# Altium PCB powermodel.PcbDoc
Units mm, origin at the board's own origin, x right, y up, seen from the top; angles counter-clockwise.
Board outline 100 x 57 mm, 2 copper layers (Top Layer, Bottom Layer); 19 components, 11 nets, 77 pads, 3 vias.
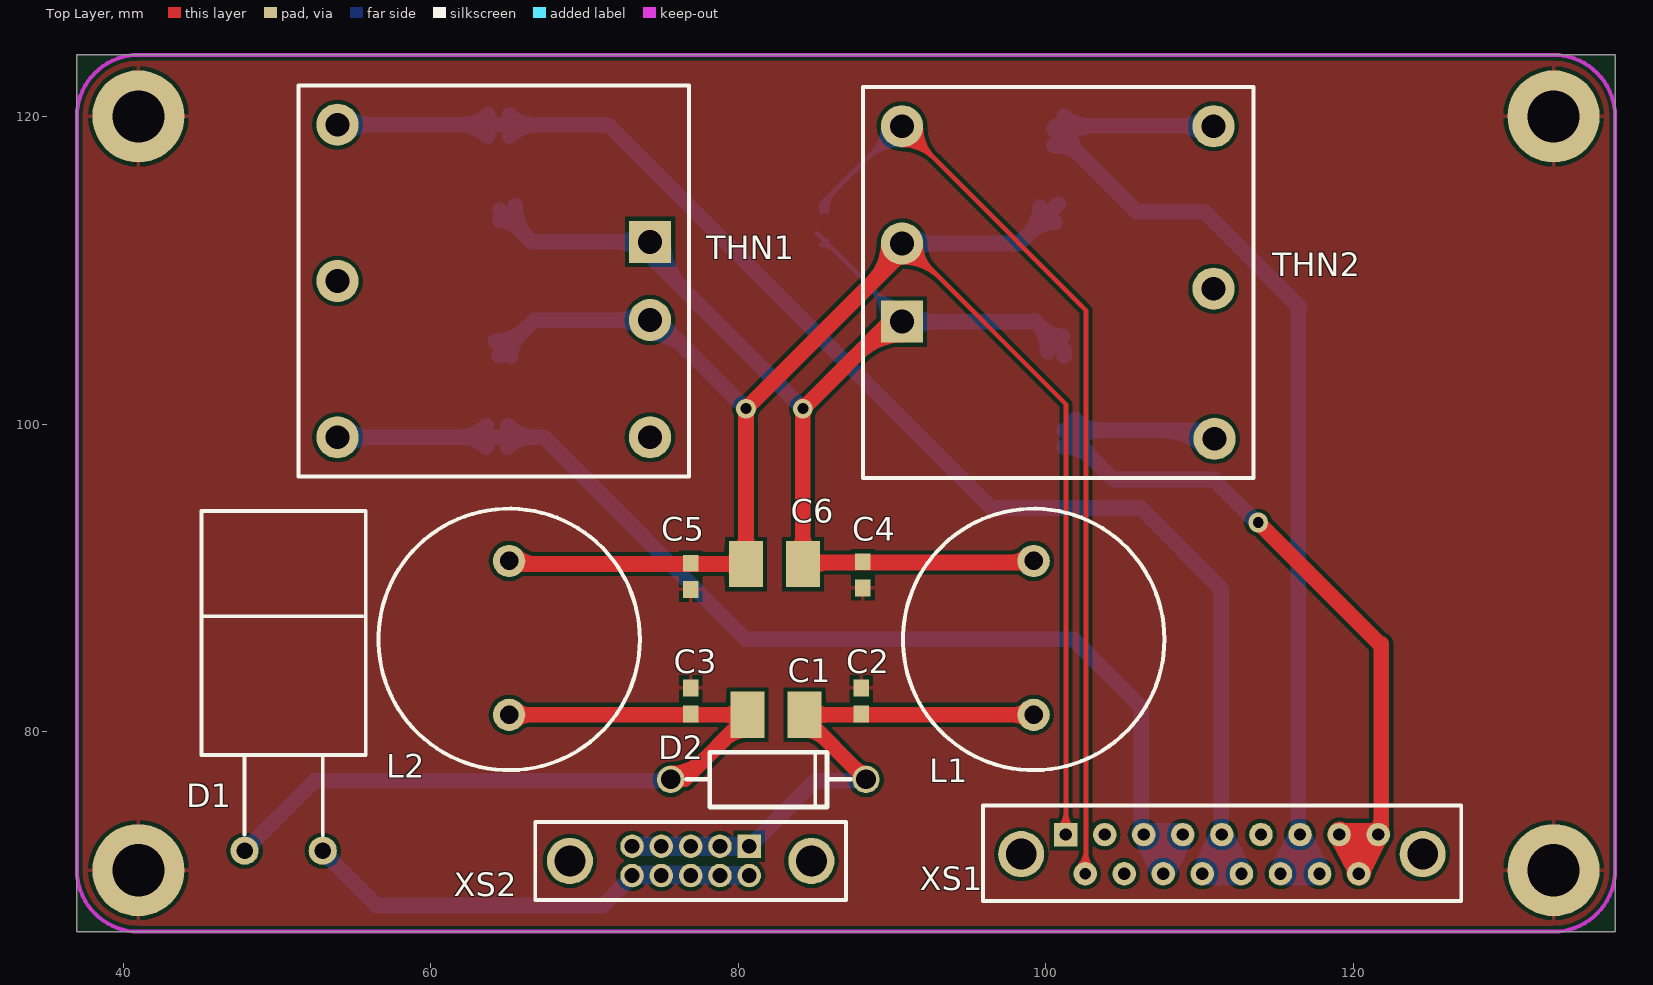
[diagram p0: Top Layer view]
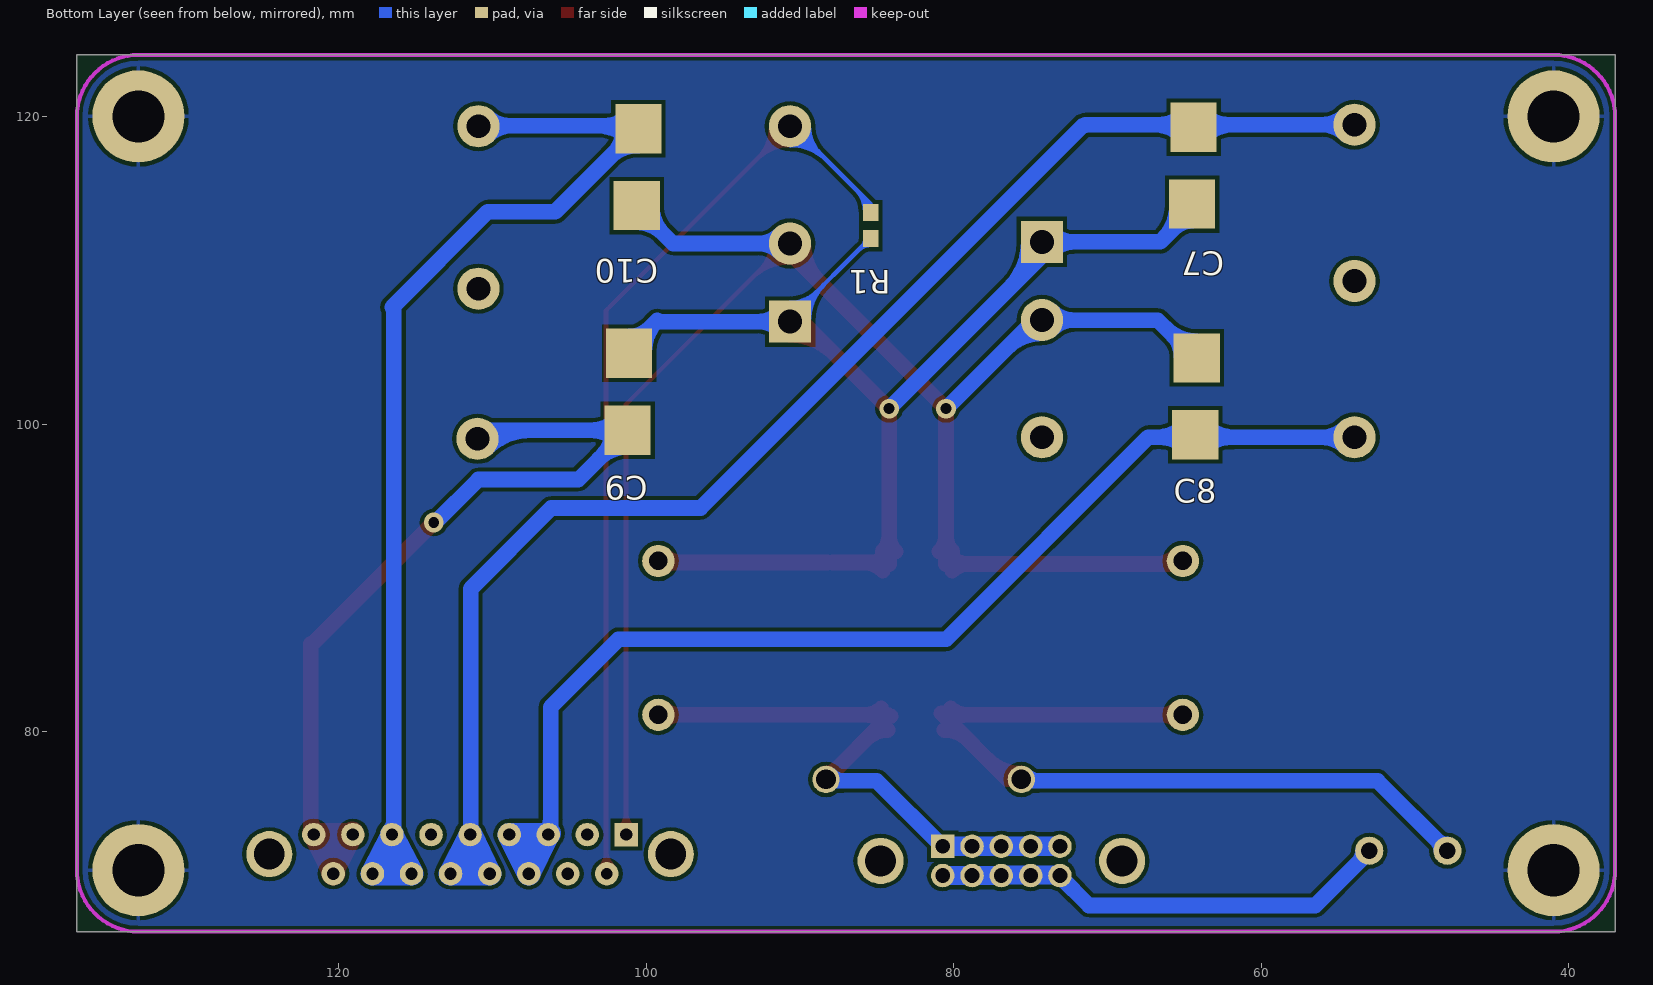
[diagram p1: Bottom Layer view, seen from below]

## Layer stack, top to bottom
Top Layer: signal copper 0.0356
Dielectric: dielectric 0.32, FR-4, Dk 4.8
Bottom Layer: signal copper 0.0356

## Board outline
37,124 137,124 137,67 37,67 37,124

## Design rules (kind name [scope] priority, off if disabled: settings)
Clearance Clearance_3 [All] p1: gap=0.254
Clearance Clearance_2 [All] p2: gap=0.254
Clearance Clearance_1 [All] p3: gap=0.254
Clearance [All] p4: gap=0.254
HoleSize [All] p1: absolutevalues=TRUE maxlimit=3.4 minlimit=0.025 maxpercent=80.000 minpercent=20.000
PolygonConnect [All] p1: connectstyle=Relief reliefconductorwidth=0.254 reliefentries=4 polygonreliefangle="90 Angle"
RoutingVias RoutingVias_1 [All] p1: holewidth=3.4 width=6 viastyle="Through Hole" minholewidth=0.711 minwidth=1.27 maxholewidth=3.4 maxwidth=6
RoutingVias [All] p2: holewidth=3.4 width=6 viastyle="Through Hole" minholewidth=0.711 minwidth=1.27 maxholewidth=5 maxwidth=10
SolderMaskExpansion [All] p1: expansion=0.102
TestPointUsage [All] p1: valid=0 allowmultiple=FALSE
Testpoint [All] p1: side=15 testpointundercomponent=TRUE minsize=1.016 maxsize=2.54 preferedsize=1.524 minholesize=0 maxholesize=1.016 preferedholesize=0.813 testpointgrid=0.025 style=1023 order=0123456789
Width [All] p1: maxlimit=3 minlimit=0.254 preferedwidth=0.254 toplayer_minwidth=0.3 toplayer_prefwidth=0.3 bottomlayer_minwidth=0.3 bottomlayer_prefwidth=0.3 minimp=50.000000 maximp=50.000000 favimp=50.000000
18 further rules are at their usual default settings.

## Components (designator, comment, footprint, x,y, rotation, side; value= is the part's Value field where it differs from the comment)
C1 "10uF/25V" 3225 84.2,79.7 r180 top
C2 "0.15uF/25V" 1608[0603] 88,82 r270 top
C3 "0.15uF/25V" 1608[0603] 76.9,82 r90 top
C4 "0.15uF/25V" 1608[0603] 88.1,90.2 r90 top
C5 "0.15uF/25V" 1608[0603] 76.9,90.1 r270 top
C6 "10uF/25V" 3225 84.1,89.5 r180 top
C7 "470pF/2KV" 4520 65.8,114.5 r90 bottom
C8 "470pF/2KV" 4520 62.9,104.1 r270 bottom
C9 "470pF/2KV" 4520 99.8,104.4 r270 bottom
C10 "470pF/2KV" 4520 101.9,114.4 r90 bottom
D1 "SB1030" SB1030 35.204,76.835 r0 top
D2 "P6KE22A" P6KE22A 75.6,77.4 r180 top
L1 "" "TDK SL1720" 99.2,86.1 r90 top locked
L2 "" "TDK SL1720" 65.1,86.1 r90 top locked
R1 "RMK1608KB102FM" 1608[0603] 85.4,112.9 r270 bottom
THN1 "THN15-1211" THN12-1211 51.4,122 r270 top locked
THN2 "THN15-1212" THN12-1212 113.5,96.5 r90 top locked
XS1 "" 17pin 95.8,75.1 r270 top
XS2 "" 10pin 76.9,71.6 r270 top locked

## Footprints (in the part's own frame and the unit in brackets; to place one, negate y for a bottom-side part, rotate by r counter-clockwise, add the part's x,y. Pads: shape width x height; smd on the part's side, far side on the other; paste and mask are expansions set on the pad)
10pin [mil] "CRM242-010-221-8800"
  round 118.11 hole 78.74: 0(0,309.06) 0(0,-309.06)
  rect 60x60 hole 37.48: 1(-37.5,150)
  round 60 hole 37.48: 2(37.5,150) 3(-37.5,75) 4(37.5,75) 5(-37.5,0) 6(37.5,0) 7(-37.5,-75) 8(37.5,-75) 9(-37.5,-150) 10(37.5,-150)
  silkscreen extent -100,-398 100,398
17pin [mil]
  round 118.11 hole 78.74: 0(120.39,1129.41) 0(120.39,101.85)
  round 60 hole 31.5: 1(70.39,1015.63) 2(170.39,965.63) 3(70.39,915.63) 4(170.39,865.63) 5(70.39,815.63) 6(170.39,765.63) 7(70.39,715.63) 8(170.39,665.63) 9(70.39,615.63) 10(170.39,565.63) 11(70.39,515.63) 12(170.39,465.63) 13(70.39,415.63) 14(170.39,365.63) 15(70.39,315.63)
  round 60 hole 30: 16(170.39,265.63)
  rect 60x60 hole 31.5: 17(70.39,215.63)
  silkscreen extent -4,4 240,1228
1608[0603] [mm] "Chip Capacitor; Body 1.6 x 0.8 mm (LxW typ)"
  rect 1.1x1 smd: 1(-0.85,0) 2(0.85,0)
3225 [mm] "TDK Capacity"
  rect 2.2x3 smd: 1(-0.1,-1.4) 2(3.6,-1.4)
4520 [mm] "TDK Capacity"
  rect 3.2x3 smd: 1(-0.2,-1.3) 2(4.8,-1.4)
P6KE22A [mil] "600W瞬态抑制管起过压保护"
  round 70 hole 50: 1(0,19.68) 2(-500,19.68)
  silkscreen extent -461,-50 -40,91
SB1030 [mil] "10A肖特基势垒整流器起反接保护"
  round 72 hole 42: 1(500,-180) 2(700,-180)
  silkscreen extent 390,-141 810,690
"TDK SL1720" [mm] "TDK Conductor"
  round 2.1 hole 1.2: 1(-5,0) 2(5,0)
  silkscreen extent -8.6,-8.5 8.4,8.5
THN12-1211 [mil] "DC/DC Converter"
  rect 108x108 hole 61: 1(400,900)
  round 108 hole 61: 2(600,900) 3(900,900) 4(100,100) 5(500,100) 6(900,100)
  silkscreen extent 0,0 1000,1000
THN12-1212 [mil] "DC/DC Converter"
  rect 108x108 hole 61: 1(400,900)
  round 108 hole 61: 2(600,900) 3(900,900) 4(100,100) 5(484.25,102.36) 6(900,102.36)
  silkscreen extent 0,0 1000,1000

## Part data
C1 C5 C6 C10: library part CAP, "Capacitor"
C2 C3: library part "Cap Semi", "Capacitor (Semiconductor SIM Model)"
C4: library part "Cap Semi", "Capacitor TDK C1608X5R1E154K"
C7 C8 C9: library part CAP, "Capacitor TDK C4520X7R3D471K"
D1 D2: library part DIODE, "Diode"
L1 L2: library part Inductor, "Inductor TDK SL1720-221KR8-PF"
R1: library part Res1, "Resistor"
XS1: library part "Header 2", "Header, 2-Pin"
XS2: library part "Header 9", "Header, 9-Pin"

## Free pads (board coordinates)
  round 6 hole 3.4: 1(41,71) 2(41,120) 3(133,120) 4(133,71)

## Via types
v1: diameter 1.27, hole 0.711, Top Layer to Bottom Layer, 3 vias

## Nets (pads, with @x,y where several pads share a name; then routed paths per layer and width w, separated by ;. In a path a pad name is that pad's centre, name@x,y a point inside that pad or via, vN(x,y) a via of type N, cw(c..) or ccw(c..) an arc to the next point about the centre after c; other vN are vias at no path point)
5GND: C8.2 THN1.6 XS1.11 XS1.12 XS1.13 | length 134.3
  Bottom Layer w1.016: THN1.6 67.36,99.14 80.5,86 101.8,86 106.2,81.6 XS1.13@106.2,73.5 ; THN1.6@54.551,98.529 cw(c56.025,97.055) 56.025,99.14 ; THN1.6@54.551,98.529 cw(c56.025,97.055) 56.025,99.14 ; THN1.6@54.551,98.529 cw(c56.025,97.055) 56.025,99.14 ; THN1.6@54.551,98.529 cw(c56.025,97.055) 56.025,99.14 ; THN1.6@54.551,98.529 cw(c56.025,97.055) 56.025,99.14 ; THN1.6@54.551,99.751 ccw(c56.025,101.225) 56.025,99.14 ; THN1.6@54.551,99.751 ccw(c56.025,101.225) 56.025,99.14 ; THN1.6@54.551,99.751 ccw(c56.025,101.225) 56.025,99.14 ; THN1.6@54.551,99.751 ccw(c56.025,101.225) 56.025,99.14 ; THN1.6@54.551,99.751 ccw(c56.025,101.225) 56.025,99.14 ; 61.76,99.14 ccw(c61.76,101.74) C8.2@63.599,99.901 ; 61.76,99.14 ccw(c61.76,101.74) C8.2@63.599,99.901 ; 61.76,99.14 ccw(c61.76,101.74) C8.2@63.599,99.901 ; 61.76,99.14 ccw(c61.76,101.74) C8.2@63.599,99.901 ; 61.76,99.14 ccw(c61.76,101.74) C8.2@63.599,99.901 ; 62.05,99.14 cw(c62.05,96.95) C8.2@63.599,98.499 ; 62.05,99.14 cw(c62.05,96.95) C8.2@63.599,98.499 ; 62.05,99.14 cw(c62.05,96.95) C8.2@63.599,98.499 ; 62.05,99.14 cw(c62.05,96.95) C8.2@63.599,98.499 ; 62.05,99.14 cw(c62.05,96.95) C8.2@63.599,98.499 ; C8.2@65.001,98.499 cw(c66.55,96.95) 66.55,99.14 ; C8.2@65.001,98.499 cw(c66.55,96.95) 66.55,99.14 ; C8.2@65.001,98.499 cw(c66.55,96.95) 66.55,99.14 ; C8.2@65.001,98.499 cw(c66.55,96.95) 66.55,99.14 ; C8.2@65.001,98.499 cw(c66.55,96.95) 66.55,99.14 ; C8.2@65.001,99.901 ccw(c66.84,101.74) 66.84,99.14 ; C8.2@65.001,99.901 ccw(c66.84,101.74) 66.84,99.14 ; C8.2@65.001,99.901 ccw(c66.84,101.74) 66.84,99.14 ; C8.2@65.001,99.901 ccw(c66.84,101.74) 66.84,99.14 ; C8.2@65.001,99.901 ccw(c66.84,101.74) 66.84,99.14 ; 106.2,74.304 ccw(c107.349,74.304) XS1.13@106.537,73.492 ; 106.2,74.304 ccw(c107.349,74.304) XS1.13@106.537,73.492 ; 106.2,74.304 ccw(c107.349,74.304) XS1.13@106.537,73.492 ; 106.2,74.304 ccw(c107.349,74.304) XS1.13@106.537,73.492 ; 106.2,74.304 ccw(c107.349,74.304) XS1.13@106.537,73.492
  Bottom Layer w1.524: XS1.13@106.3,73.4 106.388,73.312 XS1.11 ; XS1.13@106.457,73.212 XS1.12@107.6,70.8 ; 107.069,72.6 107.1,72.6 ; XS1.12 XS1.11@108.9,73.3
12GND: C10.2 THN2.6 XS1.4 XS1.5 XS1.6 | length 131.1
  Bottom Layer w1.016: C10.2 105.9,113.8 110.3,113.8 116.5,107.6 ; C10.2@100.6,119.3 100.7,119.4 THN2.6@111.1,119.4 ; THN2.6 THN2.6@110.93,119.33 ; XS1.5@116.4,73.1 116.4,107.4 ; C10.2@100.5,118.108 cw(c100.5,115.472) 102.364,117.336 ; C10.2@100.5,118.108 cw(c100.5,115.472) 102.364,117.336 ; C10.2@100.5,118.108 cw(c100.5,115.472) 102.364,117.336 ; C10.2@100.5,118.108 cw(c100.5,115.472) 102.364,117.336 ; C10.2@100.5,118.108 cw(c100.5,115.472) 102.364,117.336 ; C10.2@101.201,118.599 cw(c103.136,116.664) 103.136,119.4 ; C10.2@101.201,118.599 cw(c103.136,116.664) 103.136,119.4 ; C10.2@101.201,118.599 cw(c103.136,116.664) 103.136,119.4 ; C10.2@101.201,118.599 cw(c103.136,116.664) 103.136,119.4 ; C10.2@101.201,118.599 cw(c103.136,116.664) 103.136,119.4 ; C10.2@101.201,120.001 ccw(c102.653,121.453) 102.653,119.4 ; C10.2@101.201,120.001 ccw(c102.653,121.453) 102.653,119.4 ; C10.2@101.201,120.001 ccw(c102.653,121.453) 102.653,119.4 ; C10.2@101.201,120.001 ccw(c102.653,121.453) 102.653,119.4 ; C10.2@101.201,120.001 ccw(c102.653,121.453) 102.653,119.4 ; C10.2@101.492,119.1 ccw(c103.645,119.1) 102.123,117.577 ; C10.2@101.492,119.1 ccw(c103.645,119.1) 102.123,117.577 ; C10.2@101.492,119.1 ccw(c103.645,119.1) 102.123,117.577 ; C10.2@101.492,119.1 ccw(c103.645,119.1) 102.123,117.577 ; C10.2@101.492,119.1 ccw(c103.645,119.1) 102.123,117.577 ; 108.719,119.4 cw(c108.719,117.179) THN2.6@110.289,118.749 ; 108.719,119.4 cw(c108.719,117.179) THN2.6@110.289,118.749 ; 108.719,119.4 cw(c108.719,117.179) THN2.6@110.289,118.749 ; 108.719,119.4 cw(c108.719,117.179) THN2.6@110.289,118.749 ; 108.719,119.4 cw(c108.719,117.179) THN2.6@110.289,118.749 ; 108.912,119.4 ccw(c108.912,121.348) THN2.6@110.289,119.971 ; 108.912,119.4 ccw(c108.912,121.348) THN2.6@110.289,119.971 ; 108.912,119.4 ccw(c108.912,121.348) THN2.6@110.289,119.971 ; 108.912,119.4 ccw(c108.912,121.348) THN2.6@110.289,119.971 ; 108.912,119.4 ccw(c108.912,121.348) THN2.6@110.289,119.971 ; 116.4,74.208 ccw(c117.413,74.208) XS1.5@116.697,73.492 ; 116.4,74.208 ccw(c117.413,74.208) XS1.5@116.697,73.492 ; 116.4,74.208 ccw(c117.413,74.208) XS1.5@116.697,73.492 ; 116.4,74.208 ccw(c117.413,74.208) XS1.5@116.697,73.492
  Bottom Layer w1.524: XS1.5@116.5,73.3 XS1.4 ; XS1.5@116.548,73.315 115.225,70.772 XS1.4@117.728,70.772
+5VOUT: C7.2 THN1.4 XS1.8 XS1.9 XS1.10 | length 151.5
  Bottom Layer w1.016: THN1.4@54,120 54,119.7 THN1.4@54.24,119.46 ; XS1.9@111.388,73.312 XS1.9@111.4,73.312 ; 111.4,71.2 111.437,71.237 111.437,73.218 XS1.9 XS1.9@111.4,73.312 ; THN1.4@54.24,119.46 71.44,119.46 71.5,119.4 71.6,119.4 96.46,94.54 106.16,94.54 111.4,89.3 XS1.9@111.4,73.312 ; THN1.4@54.24,119.46 THN1.4 THN1.4@54.24,119.46 ; THN1.4@54.551,118.849 cw(c56.025,117.375) 56.025,119.46 ; THN1.4@54.551,118.849 cw(c56.025,117.375) 56.025,119.46 ; THN1.4@54.551,118.849 cw(c56.025,117.375) 56.025,119.46 ; THN1.4@54.551,118.849 cw(c56.025,117.375) 56.025,119.46 ; THN1.4@54.551,118.849 cw(c56.025,117.375) 56.025,119.46 ; THN1.4@54.551,120.071 ccw(c56.025,121.545) 56.025,119.46 ; THN1.4@54.551,120.071 ccw(c56.025,121.545) 56.025,119.46 ; THN1.4@54.551,120.071 ccw(c56.025,121.545) 56.025,119.46 ; THN1.4@54.551,120.071 ccw(c56.025,121.545) 56.025,119.46 ; THN1.4@54.551,120.071 ccw(c56.025,121.545) 56.025,119.46 ; 61.86,119.46 cw(c61.86,116.86) C7.2@63.699,118.699 ; 61.86,119.46 cw(c61.86,116.86) C7.2@63.699,118.699 ; 61.86,119.46 cw(c61.86,116.86) C7.2@63.699,118.699 ; 61.86,119.46 cw(c61.86,116.86) C7.2@63.699,118.699 ; 61.86,119.46 cw(c61.86,116.86) C7.2@63.699,118.699 ; 62.15,119.46 ccw(c62.15,121.65) C7.2@63.699,120.101 ; 62.15,119.46 ccw(c62.15,121.65) C7.2@63.699,120.101 ; 62.15,119.46 ccw(c62.15,121.65) C7.2@63.699,120.101 ; 62.15,119.46 ccw(c62.15,121.65) C7.2@63.699,120.101 ; 62.15,119.46 ccw(c62.15,121.65) C7.2@63.699,120.101 ; C7.2@65.101,118.699 cw(c66.94,116.86) 66.94,119.46 ; C7.2@65.101,118.699 cw(c66.94,116.86) 66.94,119.46 ; C7.2@65.101,118.699 cw(c66.94,116.86) 66.94,119.46 ; C7.2@65.101,118.699 cw(c66.94,116.86) 66.94,119.46 ; C7.2@65.101,118.699 cw(c66.94,116.86) 66.94,119.46 ; C7.2@65.101,120.101 ccw(c66.65,121.65) 66.65,119.46 ; C7.2@65.101,120.101 ccw(c66.65,121.65) 66.65,119.46 ; C7.2@65.101,120.101 ccw(c66.65,121.65) 66.65,119.46 ; C7.2@65.101,120.101 ccw(c66.65,121.65) 66.65,119.46 ; C7.2@65.101,120.101 ccw(c66.65,121.65) 66.65,119.46 ; XS1.9@111.3,73.3 XS1.9@111.3,73.312 ; XS1.9@111.3,73.3 XS1.9@111.3,73.312 ; XS1.9@111.3,73.3 XS1.9@111.3,73.312 ; XS1.9@111.3,73.312 111.3,73.4 XS1.9@111.3,73.312
  Bottom Layer w1.524: XS1.9@111.388,73.312 XS1.9@111.397,73.294 ; XS1.9@111.4,73.3 XS1.9@111.397,73.294 ; XS1.8@112.7,70.8 111.437,73.218 111.399,73.292 XS1.9@111.397,73.294 ; XS1.8@112.728,70.772 XS1.10 XS1.9@111.397,73.294
+12VOUT: C9.2 THN2.4 XS1.1 XS1.2 XS1.3 | length 116
  Top Layer w1.016: v1(113.8,93.6) 121.75,85.65 ; XS1.2@120.2,70.9 120.3,70.8 XS1.2@120.3,70.7 ; XS1.1@121.5,73.2 XS1.1@121.6,73.2 ; XS1.1 121.788,73.312 XS1.1@121.8,73.3 ; XS1.1@121.8,73.2 XS1.1@121.8,73.3 ; 121.8,85.7 XS1.1@121.8,73.3 ; XS1.1@121.417,73.492 ccw(c120.494,74.415) 121.8,74.415 ; XS1.1@121.417,73.492 ccw(c120.494,74.415) 121.8,74.415 ; XS1.1@121.417,73.492 ccw(c120.494,74.415) 121.8,74.415 ; XS1.1@121.417,73.492 ccw(c120.494,74.415) 121.8,74.415 ; XS1.1@121.417,73.492 ccw(c120.494,74.415) 121.8,74.415
  Top Layer w1.524: XS1.3@119.1,73.4 119.127,73.349 XS1.3@119.146,73.312 ; XS1.3@119.188,73.312 XS1.3@119.146,73.312 ; XS1.2@120.4,70.931 XS1.3@119.146,73.312 ; XS1.1@121.5,73.3 121.488,73.312 XS1.3@119.146,73.312 ; XS1.1@121.6,73.4 XS1.2@120.3,70.8 ; XS1.3@119.146,73.312 XS1.3 XS1.3@119.146,73.312 ; XS1.2@120.3,70.8 XS1.2@120.355,70.8 ; XS1.2@120.3,70.8 XS1.2@120.327,70.8 ; XS1.2@120.3,70.8 XS1.2@120.327,70.8 ; XS1.2@120.3,70.8 XS1.2@120.327,70.8 ; XS1.2@120.327,70.8 XS1.2@120.355,70.8 ; XS1.2@120.327,70.8 XS1.2@120.355,70.8 ; XS1.2@120.327,70.8 XS1.2@120.355,70.8 ; XS1.2@120.355,70.8 XS1.2 XS1.2@120.355,70.8
  Bottom Layer w1.016: THN2.4@110.3,99.6 C9.2 104.4,96.4 110.9,96.4 v1@113.7,93.6 ; THN2.4@110.9,98.9 THN2.4@110.9,99.5 ; C9.2@101.2,98.508 cw(c101.2,95.872) 103.064,97.736 ; C9.2@101.2,98.508 cw(c101.2,95.872) 103.064,97.736 ; C9.2@101.2,98.508 cw(c101.2,95.872) 103.064,97.736 ; C9.2@101.2,98.508 cw(c101.2,95.872) 103.064,97.736 ; C9.2@101.2,98.508 cw(c101.2,95.872) 103.064,97.736 ; C9.2@101.901,98.899 cw(c103.595,97.205) 103.595,99.6 ; C9.2@101.901,98.899 cw(c103.595,97.205) 103.595,99.6 ; C9.2@101.901,98.899 cw(c103.595,97.205) 103.595,99.6 ; C9.2@101.901,98.899 cw(c103.595,97.205) 103.595,99.6 ; C9.2@101.901,98.899 cw(c103.595,97.205) 103.595,99.6 ; C9.2@101.901,100.301 ccw(c103.595,101.995) 103.595,99.6 ; C9.2@101.901,100.301 ccw(c103.595,101.995) 103.595,99.6 ; C9.2@101.901,100.301 ccw(c103.595,101.995) 103.595,99.6 ; C9.2@101.901,100.301 ccw(c103.595,101.995) 103.595,99.6 ; C9.2@101.901,100.301 ccw(c103.595,101.995) 103.595,99.6 ; C9.2@102.192,99.5 ccw(c104.345,99.5) 102.823,97.977 ; C9.2@102.192,99.5 ccw(c104.345,99.5) 102.823,97.977 ; C9.2@102.192,99.5 ccw(c104.345,99.5) 102.823,97.977 ; C9.2@102.192,99.5 ccw(c104.345,99.5) 102.823,97.977 ; C9.2@102.192,99.5 ccw(c104.345,99.5) 102.823,97.977 ; 107.523,99.6 cw(c107.523,95.603) THN2.4@110.349,98.429 ; 107.523,99.6 cw(c107.523,95.603) THN2.4@110.349,98.429 ; 107.523,99.6 cw(c107.523,95.603) THN2.4@110.349,98.429 ; 107.523,99.6 cw(c107.523,95.603) THN2.4@110.349,98.429 ; 107.523,99.6 cw(c107.523,95.603) THN2.4@110.349,98.429
+14.4V: C1.1 C2.2 D2.2 L1.1 XS2.1 XS2.3 XS2.5 XS2.7 XS2.9 | length 76.1
  Top Layer w1.016: XS2.9 73.153,72.552 XS2.9@73.1,72.5 ; XS2.1@80.648,72.552 XS2.1@80.7,72.5 ; XS2.1 XS2.1@80.748,72.552 ; C1.1@84.1,81 84.2,81 D2.2 D2.2@88.4,77 ; C1.1 L1.1 L1.1@99.4,80.9 ; C1.1@84.3,80.108 cw(c84.3,78.196) 85.652,79.548 ; C1.1@84.3,80.108 cw(c84.3,78.196) 85.652,79.548 ; C1.1@84.3,80.108 cw(c84.3,78.196) 85.652,79.548 ; C1.1@84.3,80.108 cw(c84.3,78.196) 85.652,79.548 ; C1.1@84.3,80.108 cw(c84.3,78.196) 85.652,79.548 ; C1.1@84.719,80.681 cw(c85.729,79.671) 85.729,81.1 ; C1.1@84.719,80.681 cw(c85.729,79.671) 85.729,81.1 ; C1.1@84.719,80.681 cw(c85.729,79.671) 85.729,81.1 ; C1.1@84.719,80.681 cw(c85.729,79.671) 85.729,81.1 ; C1.1@84.719,80.681 cw(c85.729,79.671) 85.729,81.1 ; C1.1@84.719,81.519 ccw(c85.729,82.529) 85.729,81.1 ; C1.1@84.719,81.519 ccw(c85.729,82.529) 85.729,81.1 ; C1.1@84.719,81.519 ccw(c85.729,82.529) 85.729,81.1 ; C1.1@84.719,81.519 ccw(c85.729,82.529) 85.729,81.1 ; C1.1@84.719,81.519 ccw(c85.729,82.529) 85.729,81.1 ; 87.65,77.55 cw(c86.999,76.9) D2.2@87.919,76.9 ; 87.65,77.55 ccw(c88.3,78.201) D2.2@88.3,77.281 ; 87.65,77.55 cw(c86.999,76.9) D2.2@87.919,76.9 ; 87.65,77.55 ccw(c88.3,78.201) D2.2@88.3,77.281 ; 87.65,77.55 cw(c86.999,76.9) D2.2@87.919,76.9 ; 87.65,77.55 ccw(c88.3,78.201) D2.2@88.3,77.281 ; 87.65,77.55 cw(c86.999,76.9) D2.2@87.919,76.9 ; 87.65,77.55 ccw(c88.3,78.201) D2.2@88.3,77.281 ; 87.65,77.55 ccw(c88.3,78.201) D2.2@88.3,77.281 ; 97.891,81.1 cw(c97.891,79.791) L1.1@98.817,80.717 ; 97.891,81.1 ccw(c97.891,82.409) L1.1@98.817,81.483 ; 97.891,81.1 cw(c97.891,79.791) L1.1@98.817,80.717 ; 97.891,81.1 ccw(c97.891,82.409) L1.1@98.817,81.483 ; 97.891,81.1 cw(c97.891,79.791) L1.1@98.817,80.717 ; 97.891,81.1 ccw(c97.891,82.409) L1.1@98.817,81.483 ; 97.891,81.1 cw(c97.891,79.791) L1.1@98.817,80.717 ; 97.891,81.1 ccw(c97.891,82.409) L1.1@98.817,81.483 ; 97.891,81.1 ccw(c97.891,82.409) L1.1@98.817,81.483 ; 97.891,81.1 cw(c97.891,79.791) L1.1@98.817,80.717
  Bottom Layer w1.016: XS2.1 80.748,72.552 84.995,76.8 D2.2@88.4,76.8 ; 87.139,76.8 ccw(c87.139,78.061) 88.031,77.169 cw(c87.139,78.061) 87.139,76.8
  Bottom Layer w1.27: XS2.9 XS2.1@80.8,72.552
GND2: C5.1 C6.2 C8.1 C10.1 L2.2 THN1.2 THN2.2 XS1.17 | length 304.7
  Top Layer w0.3: THN2.2@90.85,111.75 101.3,101.3 XS1.17@101.3,73.4 ; THN2.2@90.64,110.518 cw(c90.64,107.038) 93.101,109.499 ; THN2.2@90.64,110.518 cw(c90.64,107.038) 93.101,109.499 ; THN2.2@90.64,110.518 cw(c90.64,107.038) 93.101,109.499 ; THN2.2@90.64,110.518 cw(c90.64,107.038) 93.101,109.499 ; THN2.2@90.64,110.518 cw(c90.64,107.038) 93.101,109.499 ; THN2.2@90.64,110.818 cw(c90.64,108.062) 92.589,110.011 ; THN2.2@90.64,110.818 cw(c90.64,108.062) 92.589,110.011 ; THN2.2@90.64,110.818 cw(c90.64,108.062) 92.589,110.011 ; THN2.2@90.64,110.818 cw(c90.64,108.062) 92.589,110.011 ; THN2.2@90.64,110.818 cw(c90.64,108.062) 92.589,110.011 ; THN2.2@90.64,111.118 cw(c90.64,109.087) 92.077,110.523 ; THN2.2@90.64,111.118 cw(c90.64,109.087) 92.077,110.523 ; THN2.2@90.64,111.118 cw(c90.64,109.087) 92.077,110.523 ; THN2.2@90.64,111.118 cw(c90.64,109.087) 92.077,110.523 ; THN2.2@90.64,111.118 cw(c90.64,109.087) 92.077,110.523 ; THN2.2@91.562,111.74 ccw(c93.255,111.74) 92.058,110.542 ; THN2.2@91.562,111.74 ccw(c93.255,111.74) 92.058,110.542 ; THN2.2@91.562,111.74 ccw(c93.255,111.74) 92.058,110.542 ; THN2.2@91.562,111.74 ccw(c93.255,111.74) 92.058,110.542 ; THN2.2@91.562,111.74 ccw(c93.255,111.74) 92.058,110.542 ; THN2.2@91.862,111.74 ccw(c94.28,111.74) 92.57,110.03 ; THN2.2@91.862,111.74 ccw(c94.28,111.74) 92.57,110.03 ; THN2.2@91.862,111.74 ccw(c94.28,111.74) 92.57,110.03 ; THN2.2@91.862,111.74 ccw(c94.28,111.74) 92.57,110.03 ; THN2.2@91.862,111.74 ccw(c94.28,111.74) 92.57,110.03 ; XS1.17@100.844,73.745 ccw(c99.744,74.845) 101.3,74.845 ; XS1.17@100.844,73.745 ccw(c99.744,74.845) 101.3,74.845 ; XS1.17@100.844,73.745 ccw(c99.744,74.845) 101.3,74.845 ; XS1.17@100.844,73.745 ccw(c99.744,74.845) 101.3,74.845 ; XS1.17@100.844,73.745 ccw(c99.744,74.845) 101.3,74.845 ; XS1.17@101.056,73.533 ccw(c100.468,74.121) 101.3,74.121 ; XS1.17@101.056,73.533 ccw(c100.468,74.121) 101.3,74.121 ; XS1.17@101.056,73.533 ccw(c100.468,74.121) 101.3,74.121 ; XS1.17@101.056,73.533 ccw(c100.468,74.121) 101.3,74.121 ; XS1.17@101.056,73.533 ccw(c100.468,74.121) 101.3,74.121 ; 101.3,74.734 ccw(c102.699,74.734) XS1.17@101.71,73.745 ; 101.3,74.734 ccw(c102.699,74.734) XS1.17@101.71,73.745 ; 101.3,74.734 ccw(c102.699,74.734) XS1.17@101.71,73.745 ; 101.3,74.734 ccw(c102.699,74.734) XS1.17@101.71,73.745 ; 101.3,74.734 ccw(c102.699,74.734) XS1.17@101.71,73.745
  Top Layer w1.016: L2.2@65.1,90.9 C6.2 v1@80.5,100.9 ; v1(80.5,101) 90.7,111.2 THN2.2@90.7,111.6 ; L2.2@65.483,91.483 ccw(c66.891,92.891) 66.891,90.9 ; L2.2@65.483,91.483 ccw(c66.891,92.891) 66.891,90.9 ; L2.2@65.483,91.483 ccw(c66.891,92.891) 66.891,90.9 ; L2.2@65.483,91.483 ccw(c66.891,92.891) 66.891,90.9 ; L2.2@65.483,91.483 ccw(c66.891,92.891) 66.891,90.9 ; 79.071,90.9 cw(c79.071,89.471) C6.2@80.081,90.481 ; 79.071,90.9 ccw(c79.071,92.329) C6.2@80.081,91.319 ; 79.071,90.9 cw(c79.071,89.471) C6.2@80.081,90.481 ; 79.071,90.9 ccw(c79.071,92.329) C6.2@80.081,91.319 ; 79.071,90.9 cw(c79.071,89.471) C6.2@80.081,90.481 ; 79.071,90.9 ccw(c79.071,92.329) C6.2@80.081,91.319 ; 79.071,90.9 cw(c79.071,89.471) C6.2@80.081,90.481 ; 79.071,90.9 ccw(c79.071,92.329) C6.2@80.081,91.319 ; 79.071,90.9 ccw(c79.071,92.329) C6.2@80.081,91.319 ; 79.071,90.9 cw(c79.071,89.471) C6.2@80.081,90.481 ; C6.2@80.081,91.719 ccw(c79.071,92.729) 80.5,92.729 ; C6.2@80.081,91.719 ccw(c79.071,92.729) 80.5,92.729 ; C6.2@80.081,91.719 ccw(c79.071,92.729) 80.5,92.729 ; C6.2@80.081,91.719 ccw(c79.071,92.729) 80.5,92.729 ; C6.2@80.081,91.719 ccw(c79.071,92.729) 80.5,92.729 ; 80.5,92.729 ccw(c81.929,92.729) C6.2@80.919,91.719 ; 80.5,92.729 ccw(c81.929,92.729) C6.2@80.919,91.719 ; 80.5,92.729 ccw(c81.929,92.729) C6.2@80.919,91.719 ; 80.5,92.729 ccw(c81.929,92.729) C6.2@80.919,91.719 ; 80.5,92.729 ccw(c81.929,92.729) C6.2@80.919,91.719 ; 88.741,109.241 ccw(c86.243,111.74) THN2.2@89.776,111.74 ; 88.741,109.241 ccw(c86.243,111.74) THN2.2@89.776,111.74 ; 88.741,109.241 ccw(c86.243,111.74) THN2.2@89.776,111.74 ; 88.741,109.241 ccw(c86.243,111.74) THN2.2@89.776,111.74 ; 88.741,109.241 ccw(c86.243,111.74) THN2.2@89.776,111.74
  Bottom Layer w1.016: C8.1@64.44,104.46 66.74,106.76 THN1.2 ; THN1.2@74.3,106.7 74.8,106.7 v1(80.5,101) ; THN2.2@90.6,111 THN2.2@90.6,111.5 ; THN2.2 98.24,111.74 C10.1@100.8,114.3 ; C8.1@64.2,105.392 ccw(c64.2,108.221) 66.201,106.221 ; C8.1@64.2,105.392 ccw(c64.2,108.221) 66.201,106.221 ; C8.1@64.2,105.392 ccw(c64.2,108.221) 66.201,106.221 ; C8.1@64.2,105.392 ccw(c64.2,108.221) 66.201,106.221 ; C8.1@64.2,105.392 ccw(c64.2,108.221) 66.201,106.221 ; C8.1@65.192,104.4 cw(c67.152,104.4) 65.766,105.786 ; C8.1@65.192,104.4 cw(c67.152,104.4) 65.766,105.786 ; C8.1@65.192,104.4 cw(c67.152,104.4) 65.766,105.786 ; C8.1@65.192,104.4 cw(c67.152,104.4) 65.766,105.786 ; C8.1@65.192,104.4 cw(c67.152,104.4) 65.766,105.786 ; 72.175,106.76 cw(c72.175,104.675) THN1.2@73.649,106.149 ; 72.175,106.76 ccw(c72.175,108.845) THN1.2@73.649,107.371 ; 72.175,106.76 cw(c72.175,104.675) THN1.2@73.649,106.149 ; 72.175,106.76 ccw(c72.175,108.845) THN1.2@73.649,107.371 ; 72.175,106.76 cw(c72.175,104.675) THN1.2@73.649,106.149 ; 72.175,106.76 ccw(c72.175,108.845) THN1.2@73.649,107.371 ; 72.175,106.76 cw(c72.175,104.675) THN1.2@73.649,106.149 ; 72.175,106.76 ccw(c72.175,108.845) THN1.2@73.649,107.371 ; 72.175,106.76 ccw(c72.175,108.845) THN1.2@73.649,107.371 ; 72.175,106.76 cw(c72.175,104.675) THN1.2@73.649,106.149 ; THN1.2@74.26,105.896 cw(c74.26,102.653) 76.554,104.946 ; THN1.2@74.26,105.896 cw(c74.26,102.653) 76.554,104.946 ; THN1.2@74.26,105.896 cw(c74.26,102.653) 76.554,104.946 ; THN1.2@74.26,105.896 cw(c74.26,102.653) 76.554,104.946 ; THN1.2@74.26,105.896 cw(c74.26,102.653) 76.554,104.946 ; THN2.2@91.251,111.129 cw(c92.725,109.655) 92.725,111.74 ; THN2.2@91.251,111.129 cw(c92.725,109.655) 92.725,111.74 ; THN2.2@91.251,111.129 cw(c92.725,109.655) 92.725,111.74 ; THN2.2@91.251,111.129 cw(c92.725,109.655) 92.725,111.74 ; THN2.2@91.251,111.129 cw(c92.725,109.655) 92.725,111.74 ; THN2.2@91.251,112.351 ccw(c92.725,113.825) 92.725,111.74 ; THN2.2@91.251,112.351 ccw(c92.725,113.825) 92.725,111.74 ; THN2.2@91.251,112.351 ccw(c92.725,113.825) 92.725,111.74 ; THN2.2@91.251,112.351 ccw(c92.725,113.825) 92.725,111.74 ; THN2.2@91.251,112.351 ccw(c92.725,113.825) 92.725,111.74 ; 98.907,112.407 cw(c100.6,110.713) C10.1@100.6,113.108 ; 98.907,112.407 ccw(c97.213,114.1) C10.1@99.608,114.1 ; 98.907,112.407 cw(c100.6,110.713) C10.1@100.6,113.108 ; 98.907,112.407 ccw(c97.213,114.1) C10.1@99.608,114.1 ; 98.907,112.407 cw(c100.6,110.713) C10.1@100.6,113.108 ; 98.907,112.407 ccw(c97.213,114.1) C10.1@99.608,114.1 ; 98.907,112.407 cw(c100.6,110.713) C10.1@100.6,113.108 ; 98.907,112.407 ccw(c97.213,114.1) C10.1@99.608,114.1 ; 98.907,112.407 ccw(c97.213,114.1) C10.1@99.608,114.1 ; 98.907,112.407 cw(c100.6,110.713) C10.1@100.6,113.108
GNDP: D1.2 XS2.2 XS2.4 XS2.6 XS2.8 XS2.10 | length 33
  Top Layer w1.016: XS2.10@73.127,70.637 XS2.10@73.137,70.627 ; XS2.2 80.753,70.647 XS2.2@80.8,70.6
  Bottom Layer w1.016: D1.2@52.9,72.2 53,72.2 56.5,68.7 71.2,68.7 XS2.10@73.1,70.6 ; XS2.4@78.6,70.6 XS2.4@78.647,70.647 ; XS2.2 80.853,70.647 XS2.2@80.9,70.6 ; D1.2@53.391,72.263 ccw(c54.486,72.263) 53.712,71.488 ; D1.2@53.391,72.263 ccw(c54.486,72.263) 53.712,71.488 ; D1.2@53.391,72.263 ccw(c54.486,72.263) 53.712,71.488
  Bottom Layer w1.27: XS2.10@73.1,70.7 XS2.2
KGND: C2.1 C3.2 C4.1 C5.2 pad.1 pad.2 pad.3 pad.4
NetC1_2: C1.2 C3.1 D1.1 D2.1 L2.1 | length 99.4
  Top Layer w1.016: L2.1 C1.2 ; D2.1 76.5,76.9 C1.2@80.8,81.2 ; L2.1@65.483,80.717 cw(c66.409,79.791) 66.409,81.1 ; L2.1@65.483,80.717 cw(c66.409,79.791) 66.409,81.1 ; L2.1@65.483,80.717 cw(c66.409,79.791) 66.409,81.1 ; L2.1@65.483,80.717 cw(c66.409,79.791) 66.409,81.1 ; L2.1@65.483,80.717 cw(c66.409,79.791) 66.409,81.1 ; L2.1@65.483,81.483 ccw(c66.409,82.409) 66.409,81.1 ; L2.1@65.483,81.483 ccw(c66.409,82.409) 66.409,81.1 ; L2.1@65.483,81.483 ccw(c66.409,82.409) 66.409,81.1 ; L2.1@65.483,81.483 ccw(c66.409,82.409) 66.409,81.1 ; L2.1@65.483,81.483 ccw(c66.409,82.409) 66.409,81.1 ; D2.1@75.6,77.281 ccw(c75.6,80.374) 77.787,78.187 ; D2.1@75.6,77.281 ccw(c75.6,80.374) 77.787,78.187 ; D2.1@75.6,77.281 ccw(c75.6,80.374) 77.787,78.187 ; D2.1@75.6,77.281 ccw(c75.6,80.374) 77.787,78.187 ; D2.1@75.6,77.281 ccw(c75.6,80.374) 77.787,78.187 ; 79.077,79.477 cw(c80.6,77.955) C1.2@80.6,80.108 ; 79.077,79.477 cw(c80.6,77.955) C1.2@80.6,80.108 ; 79.077,79.477 cw(c80.6,77.955) C1.2@80.6,80.108 ; 79.077,79.477 cw(c80.6,77.955) C1.2@80.6,80.108 ; 79.077,79.477 cw(c80.6,77.955) C1.2@80.6,80.108 ; 79.171,81.1 cw(c79.171,79.671) C1.2@80.181,80.681 ; 79.171,81.1 ccw(c79.171,82.529) C1.2@80.181,81.519 ; 79.171,81.1 cw(c79.171,79.671) C1.2@80.181,80.681 ; 79.171,81.1 ccw(c79.171,82.529) C1.2@80.181,81.519 ; 79.171,81.1 cw(c79.171,79.671) C1.2@80.181,80.681 ; 79.171,81.1 ccw(c79.171,82.529) C1.2@80.181,81.519 ; 79.171,81.1 cw(c79.171,79.671) C1.2@80.181,80.681 ; 79.171,81.1 ccw(c79.171,82.529) C1.2@80.181,81.519 ; 79.171,81.1 ccw(c79.171,82.529) C1.2@80.181,81.519 ; 79.171,81.1 cw(c79.171,79.671) C1.2@80.181,80.681
  Bottom Layer w1.016: D1.1 52.441,76.8 D2.1@75.8,76.8 ; 48.598,72.957 cw(c47.904,73.651) 47.904,72.669 ccw(c47.904,73.651) 48.598,72.957 ; 48.598,72.957 ccw(c49.292,72.263) 48.311,72.263 cw(c49.292,72.263) 48.598,72.957 ; 74.439,76.8 ccw(c74.439,78.061) 75.331,77.169 cw(c74.439,78.061) 74.439,76.8
RCOP: R1.1 THN2.3 XS1.16 | length 191.5
  Top Layer w0.3: THN2.3 93.9,116.1 ; 94,116 93.9,116.1 ; 102.4,107.6 93.9,116.1 ; 102.5,107.5 102.6,107.4 102.6,105.7 ; XS1.16@102.6,70.8 102.6,105.7 ; 102.6,106 102.6,105.7 ; THN2.3@90.64,118.138 cw(c90.64,115.189) 92.725,117.275 ; THN2.3@90.64,118.138 cw(c90.64,115.189) 92.725,117.275 ; THN2.3@90.64,118.138 cw(c90.64,115.189) 92.725,117.275 ; THN2.3@90.64,118.138 cw(c90.64,115.189) 92.725,117.275 ; THN2.3@90.64,118.138 cw(c90.64,115.189) 92.725,117.275 ; THN2.3@90.64,118.438 cw(c90.64,116.213) 92.213,117.787 ; THN2.3@90.64,118.438 cw(c90.64,116.213) 92.213,117.787 ; THN2.3@90.64,118.438 cw(c90.64,116.213) 92.213,117.787 ; THN2.3@90.64,118.438 cw(c90.64,116.213) 92.213,117.787 ; THN2.3@90.64,118.438 cw(c90.64,116.213) 92.213,117.787 ; THN2.3@90.64,118.738 cw(c90.64,117.238) 91.701,118.299 ; THN2.3@90.64,118.738 cw(c90.64,117.238) 91.701,118.299 ; THN2.3@90.64,118.738 cw(c90.64,117.238) 91.701,118.299 ; THN2.3@90.64,118.738 cw(c90.64,117.238) 91.701,118.299 ; THN2.3@90.64,118.738 cw(c90.64,117.238) 91.701,118.299 ; THN2.3@91.262,119.36 ccw(c92.762,119.36) 91.701,118.299 ; THN2.3@91.262,119.36 ccw(c92.762,119.36) 91.701,118.299 ; THN2.3@91.262,119.36 ccw(c92.762,119.36) 91.701,118.299 ; THN2.3@91.262,119.36 ccw(c92.762,119.36) 91.701,118.299 ; THN2.3@91.262,119.36 ccw(c92.762,119.36) 91.701,118.299 ; THN2.3@91.562,119.36 ccw(c93.787,119.36) 92.213,117.787 ; THN2.3@91.562,119.36 ccw(c93.787,119.36) 92.213,117.787 ; THN2.3@91.562,119.36 ccw(c93.787,119.36) 92.213,117.787 ; THN2.3@91.562,119.36 ccw(c93.787,119.36) 92.213,117.787 ; THN2.3@91.562,119.36 ccw(c93.787,119.36) 92.213,117.787 ; THN2.3@91.862,119.36 ccw(c94.811,119.36) 92.725,117.275 ; THN2.3@91.862,119.36 ccw(c94.811,119.36) 92.725,117.275 ; THN2.3@91.862,119.36 ccw(c94.811,119.36) 92.725,117.275 ; THN2.3@91.862,119.36 ccw(c94.811,119.36) 92.725,117.275 ; THN2.3@91.862,119.36 ccw(c94.811,119.36) 92.725,117.275 ; XS1.16@102.114,71.205 ccw(c100.942,72.377) 102.6,72.377 ; XS1.16@102.114,71.205 ccw(c100.942,72.377) 102.6,72.377 ; XS1.16@102.114,71.205 ccw(c100.942,72.377) 102.6,72.377 ; XS1.16@102.114,71.205 ccw(c100.942,72.377) 102.6,72.377 ; XS1.16@102.114,71.205 ccw(c100.942,72.377) 102.6,72.377 ; XS1.16@102.326,70.993 ccw(c101.666,71.653) 102.6,71.653 ; XS1.16@102.326,70.993 ccw(c101.666,71.653) 102.6,71.653 ; XS1.16@102.326,70.993 ccw(c101.666,71.653) 102.6,71.653 ; XS1.16@102.326,70.993 ccw(c101.666,71.653) 102.6,71.653 ; XS1.16@102.326,70.993 ccw(c101.666,71.653) 102.6,71.653 ; 102.6,72.122 ccw(c103.897,72.122) XS1.16@102.98,71.205 ; 102.6,72.122 ccw(c103.897,72.122) XS1.16@102.98,71.205 ; 102.6,72.122 ccw(c103.897,72.122) XS1.16@102.98,71.205 ; 102.6,72.122 ccw(c103.897,72.122) XS1.16@102.98,71.205 ; 102.6,72.122 ccw(c103.897,72.122) XS1.16@102.98,71.205
  Bottom Layer w0.3: R1.1 85.4,114.3 THN2.3@90.4,119.3 ; R1.1@85.45,113.8 cw(c86.778,113.8) 85.839,114.739 ; R1.1@85.45,113.8 cw(c86.778,113.8) 85.839,114.739 ; R1.1@85.45,113.8 cw(c86.778,113.8) 85.839,114.739 ; R1.1@85.45,113.8 cw(c86.778,113.8) 85.839,114.739 ; R1.1@85.45,113.8 cw(c86.778,113.8) 85.839,114.739 ; R1.1@85.75,113.8 cw(c87.802,113.8) 86.351,115.251 ; R1.1@85.75,113.8 cw(c87.802,113.8) 86.351,115.251 ; R1.1@85.75,113.8 cw(c87.802,113.8) 86.351,115.251 ; R1.1@85.75,113.8 cw(c87.802,113.8) 86.351,115.251 ; R1.1@85.75,113.8 cw(c87.802,113.8) 86.351,115.251 ; 88.247,117.147 cw(c90.64,114.755) THN2.3@90.64,118.138 ; 88.247,117.147 cw(c90.64,114.755) THN2.3@90.64,118.138 ; 88.247,117.147 cw(c90.64,114.755) THN2.3@90.64,118.138 ; 88.247,117.147 cw(c90.64,114.755) THN2.3@90.64,118.138 ; 88.247,117.147 cw(c90.64,114.755) THN2.3@90.64,118.138 ; 88.682,117.582 ccw(c86.904,119.36) THN2.3@89.418,119.36 ; 88.682,117.582 ccw(c86.904,119.36) THN2.3@89.418,119.36 ; 88.682,117.582 ccw(c86.904,119.36) THN2.3@89.418,119.36 ; 88.682,117.582 ccw(c86.904,119.36) THN2.3@89.418,119.36 ; 88.682,117.582 ccw(c86.904,119.36) THN2.3@89.418,119.36 ; 88.759,117.659 cw(c90.64,115.779) THN2.3@90.64,118.438 ; 88.759,117.659 cw(c90.64,115.779) THN2.3@90.64,118.438 ; 88.759,117.659 cw(c90.64,115.779) THN2.3@90.64,118.438 ; 88.759,117.659 cw(c90.64,115.779) THN2.3@90.64,118.438 ; 88.759,117.659 cw(c90.64,115.779) THN2.3@90.64,118.438 ; 89.194,118.094 ccw(c87.928,119.36) THN2.3@89.718,119.36 ; 89.194,118.094 ccw(c87.928,119.36) THN2.3@89.718,119.36 ; 89.194,118.094 ccw(c87.928,119.36) THN2.3@89.718,119.36 ; 89.194,118.094 ccw(c87.928,119.36) THN2.3@89.718,119.36 ; 89.194,118.094 ccw(c87.928,119.36) THN2.3@89.718,119.36 ; 89.272,118.172 cw(c90.64,116.803) THN2.3@90.64,118.738 ; 89.272,118.172 cw(c90.64,116.803) THN2.3@90.64,118.738 ; 89.272,118.172 cw(c90.64,116.803) THN2.3@90.64,118.738 ; 89.272,118.172 cw(c90.64,116.803) THN2.3@90.64,118.738 ; 89.272,118.172 cw(c90.64,116.803) THN2.3@90.64,118.738
  Bottom Layer w1.016: THN2.3@90.5,118.85 THN2.3@90.5,119.7
VCC2: C4.2 C6.1 C7.1 C9.1 L1.2 R1.2 THN1.1 THN2.1 | length 270.2
  Top Layer w1.016: C6.1 v1(84.2,101) ; C6.1@84.2,91 C4.2@87.9,91 ; v1@84.2,101.2 v1(84.2,101) ; C4.2@88.2,91 L1.2@99.3,91 ; THN2.1@90.6,106.4 THN2.1@90.6,106.6 ; THN2.1@90.6,106.7 THN2.1@90.6,106.6 ; THN2.1@90.8,106.6 THN2.1@90.6,106.6 ; L1.2 L1.2@99.3,91.1 ; C6.1@83.781,91.719 ccw(c82.771,92.729) 84.2,92.729 ; C6.1@83.781,91.719 ccw(c82.771,92.729) 84.2,92.729 ; C6.1@83.781,91.719 ccw(c82.771,92.729) 84.2,92.729 ; C6.1@83.781,91.719 ccw(c82.771,92.729) 84.2,92.729 ; C6.1@83.781,91.719 ccw(c82.771,92.729) 84.2,92.729 ; 84.2,92.729 ccw(c85.629,92.729) C6.1@84.619,91.719 ; 84.2,92.729 ccw(c85.629,92.729) C6.1@84.619,91.719 ; 84.2,92.729 ccw(c85.629,92.729) C6.1@84.619,91.719 ; 84.2,92.729 ccw(c85.629,92.729) C6.1@84.619,91.719 ; 84.2,92.729 ccw(c85.629,92.729) C6.1@84.619,91.719 ; v1(84.2,101) 89.8,106.6 THN2.1@90.6,106.6 ; C6.1@84.619,90.481 cw(c85.871,89.229) 85.871,91 ; C6.1@84.619,90.481 cw(c85.871,89.229) 85.871,91 ; C6.1@84.619,90.481 cw(c85.871,89.229) 85.871,91 ; C6.1@84.619,90.481 cw(c85.871,89.229) 85.871,91 ; C6.1@84.619,90.481 cw(c85.871,89.229) 85.871,91 ; C6.1@84.619,91.319 ccw(c85.388,92.088) 85.388,91 ; C6.1@84.619,91.319 ccw(c85.388,92.088) 85.388,91 ; C6.1@84.619,91.319 ccw(c85.388,92.088) 85.388,91 ; C6.1@84.619,91.319 ccw(c85.388,92.088) 85.388,91 ; C6.1@84.619,91.319 ccw(c85.388,92.088) 85.388,91 ; 87.834,104.634 cw(c90.64,101.828) THN2.1@90.64,105.796 ; 87.834,104.634 cw(c90.64,101.828) THN2.1@90.64,105.796 ; 87.834,104.634 cw(c90.64,101.828) THN2.1@90.64,105.796 ; 87.834,104.634 cw(c90.64,101.828) THN2.1@90.64,105.796 ; 87.834,104.634 cw(c90.64,101.828) THN2.1@90.64,105.796 ; 97.65,91 ccw(c97.65,92.65) L1.2@98.817,91.483 ; 97.65,91 ccw(c97.65,92.65) L1.2@98.817,91.483 ; 97.65,91 ccw(c97.65,92.65) L1.2@98.817,91.483 ; 97.65,91 ccw(c97.65,92.65) L1.2@98.817,91.483 ; 97.65,91 ccw(c97.65,92.65) L1.2@98.817,91.483 ; 98.133,91 cw(c98.133,90.033) L1.2@98.817,90.717 ; 98.133,91 cw(c98.133,90.033) L1.2@98.817,90.717 ; 98.133,91 cw(c98.133,90.033) L1.2@98.817,90.717 ; 98.133,91 cw(c98.133,90.033) L1.2@98.817,90.717 ; 98.133,91 cw(c98.133,90.033) L1.2@98.817,90.717
  Bottom Layer w0.3: R1.2@85.1,112.4 90.64,106.86 THN2.1 ; R1.2@85.4,111.65 cw(c85.4,110.564) 86.168,111.332 ; R1.2@85.4,111.65 cw(c85.4,110.564) 86.168,111.332 ; R1.2@85.4,111.65 cw(c85.4,110.564) 86.168,111.332 ; R1.2@85.4,111.65 cw(c85.4,110.564) 86.168,111.332 ; R1.2@85.4,111.65 cw(c85.4,110.564) 86.168,111.332 ; R1.2@85.75,112 ccw(c86.354,112) 85.927,111.573 ; R1.2@85.75,112 ccw(c86.354,112) 85.927,111.573 ; R1.2@85.75,112 ccw(c86.354,112) 85.927,111.573 ; R1.2@85.75,112 ccw(c86.354,112) 85.927,111.573 ; R1.2@85.75,112 ccw(c86.354,112) 85.927,111.573 ; 88.413,109.087 cw(c85.986,106.66) THN2.1@89.418,106.66 ; 88.413,109.087 cw(c85.986,106.66) THN2.1@89.418,106.66 ; 88.413,109.087 cw(c85.986,106.66) THN2.1@89.418,106.66 ; 88.413,109.087 cw(c85.986,106.66) THN2.1@89.418,106.66 ; 88.413,109.087 cw(c85.986,106.66) THN2.1@89.418,106.66 ; 88.896,108.604 ccw(c90.64,110.348) THN2.1@90.64,107.882 ; 88.896,108.604 ccw(c90.64,110.348) THN2.1@90.64,107.882 ; 88.896,108.604 ccw(c90.64,110.348) THN2.1@90.64,107.882 ; 88.896,108.604 ccw(c90.64,110.348) THN2.1@90.64,107.882 ; 88.896,108.604 ccw(c90.64,110.348) THN2.1@90.64,107.882 ; 88.925,108.575 cw(c87.011,106.66) THN2.1@89.718,106.66 ; 88.925,108.575 cw(c87.011,106.66) THN2.1@89.718,106.66 ; 88.925,108.575 cw(c87.011,106.66) THN2.1@89.718,106.66 ; 88.925,108.575 cw(c87.011,106.66) THN2.1@89.718,106.66 ; 88.925,108.575 cw(c87.011,106.66) THN2.1@89.718,106.66 ; 89.408,108.092 ccw(c90.64,109.324) THN2.1@90.64,107.582 ; 89.408,108.092 ccw(c90.64,109.324) THN2.1@90.64,107.582 ; 89.408,108.092 ccw(c90.64,109.324) THN2.1@90.64,107.582 ; 89.408,108.092 ccw(c90.64,109.324) THN2.1@90.64,107.582 ; 89.408,108.092 ccw(c90.64,109.324) THN2.1@90.64,107.582 ; 89.437,108.063 cw(c88.035,106.66) THN2.1@90.018,106.66 ; 89.437,108.063 cw(c88.035,106.66) THN2.1@90.018,106.66 ; 89.437,108.063 cw(c88.035,106.66) THN2.1@90.018,106.66 ; 89.437,108.063 cw(c88.035,106.66) THN2.1@90.018,106.66 ; 89.437,108.063 cw(c88.035,106.66) THN2.1@90.018,106.66
  Bottom Layer w1.016: C7.1@64.5,113.9 66.56,111.84 THN1.1 ; THN1.1@74.4,111.8 74.4,110.8 v1(84.2,101) ; THN2.1@90.64,106.76 THN2.1 99.34,106.66 101.2,104.8 C9.1@101.2,104.4 ; C7.1@64.5,113.208 cw(c64.5,111.537) C7.1@65.681,112.719 ; C7.1@64.5,113.208 cw(c64.5,111.537) C7.1@65.681,112.719 ; C7.1@64.5,113.208 cw(c64.5,111.537) C7.1@65.681,112.719 ; C7.1@64.5,113.208 cw(c64.5,111.537) C7.1@65.681,112.719 ; C7.1@64.5,113.208 cw(c64.5,111.537) C7.1@65.681,112.719 ; C7.1@65.492,114.2 ccw(c68.611,114.2) 66.406,111.994 ; C7.1@65.492,114.2 ccw(c68.611,114.2) 66.406,111.994 ; C7.1@65.492,114.2 ccw(c68.611,114.2) 66.406,111.994 ; C7.1@65.492,114.2 ccw(c68.611,114.2) 66.406,111.994 ; C7.1@65.492,114.2 ccw(c68.611,114.2) 66.406,111.994 ; 72.175,111.84 cw(c72.175,109.755) THN1.1@73.649,111.229 ; 72.175,111.84 ccw(c72.175,113.925) THN1.1@73.649,112.451 ; 72.175,111.84 cw(c72.175,109.755) THN1.1@73.649,111.229 ; 72.175,111.84 ccw(c72.175,113.925) THN1.1@73.649,112.451 ; 72.175,111.84 cw(c72.175,109.755) THN1.1@73.649,111.229 ; 72.175,111.84 ccw(c72.175,113.925) THN1.1@73.649,112.451 ; 72.175,111.84 cw(c72.175,109.755) THN1.1@73.649,111.229 ; 72.175,111.84 ccw(c72.175,113.925) THN1.1@73.649,112.451 ; 72.175,111.84 ccw(c72.175,113.925) THN1.1@73.649,112.451 ; 72.175,111.84 cw(c72.175,109.755) THN1.1@73.649,111.229 ; THN1.1@75.124,111.84 ccw(c79.381,111.84) 76.371,108.829 ; THN1.1@75.124,111.84 ccw(c79.381,111.84) 76.371,108.829 ; THN1.1@75.124,111.84 ccw(c79.381,111.84) 76.371,108.829 ; THN1.1@75.124,111.84 ccw(c79.381,111.84) 76.371,108.829 ; THN1.1@75.124,111.84 ccw(c79.381,111.84) 76.371,108.829 ; THN2.1@91.251,106.049 cw(c92.725,104.575) 92.725,106.66 ; THN2.1@91.251,106.049 cw(c92.725,104.575) 92.725,106.66 ; THN2.1@91.251,106.049 cw(c92.725,104.575) 92.725,106.66 ; THN2.1@91.251,106.049 cw(c92.725,104.575) 92.725,106.66 ; THN2.1@91.251,106.049 cw(c92.725,104.575) 92.725,106.66 ; THN2.1@91.251,107.271 ccw(c92.725,108.745) 92.725,106.66 ; THN2.1@91.251,107.271 ccw(c92.725,108.745) 92.725,106.66 ; THN2.1@91.251,107.271 ccw(c92.725,108.745) 92.725,106.66 ; THN2.1@91.251,107.271 ccw(c92.725,108.745) 92.725,106.66 ; THN2.1@91.251,107.271 ccw(c92.725,108.745) 92.725,106.66 ; 99.265,106.735 cw(c97.23,104.7) C9.1@100.108,104.7 ; 99.265,106.735 cw(c97.23,104.7) C9.1@100.108,104.7 ; 99.265,106.735 cw(c97.23,104.7) C9.1@100.108,104.7 ; 99.265,106.735 cw(c97.23,104.7) C9.1@100.108,104.7 ; 99.265,106.735 cw(c97.23,104.7) C9.1@100.108,104.7 ; 99.748,106.252 ccw(c101.1,107.604) C9.1@101.1,105.692 ; 99.748,106.252 ccw(c101.1,107.604) C9.1@101.1,105.692 ; 99.748,106.252 ccw(c101.1,107.604) C9.1@101.1,105.692 ; 99.748,106.252 ccw(c101.1,107.604) C9.1@101.1,105.692 ; 99.748,106.252 ccw(c101.1,107.604) C9.1@101.1,105.692
pads on no net: THN1.3 THN1.5 THN2.5 XS1.0 XS1.7 XS1.14 XS1.15 XS2.0

## Polygon pours and split planes (outlines as drawn)
KGND on Top Layer "Top Layer-No Net" (solid): 37,124 37,67 137,67 137,123.9 137.1,124
KGND on Bottom Layer "Top Layer-No Net" (solid): 37.1,124 37.1,67 137,67 137,124

## Keep-outs
Keep-Out Layer:
  lines w0.254: 37,71 ccw(c41,71) 41,67 133,67 ccw(c133,71) 137,71 137,120 ccw(c133,120) 133,124 41,124 ccw(c41,120) 37,120 37,71

## Other copper
Bottom Layer:
  rectangle net 12GND: 115.3,70.2 117.7,71.8